# EAGLE board PnP-Expansion-V1 (EAGLE 9.3.0)
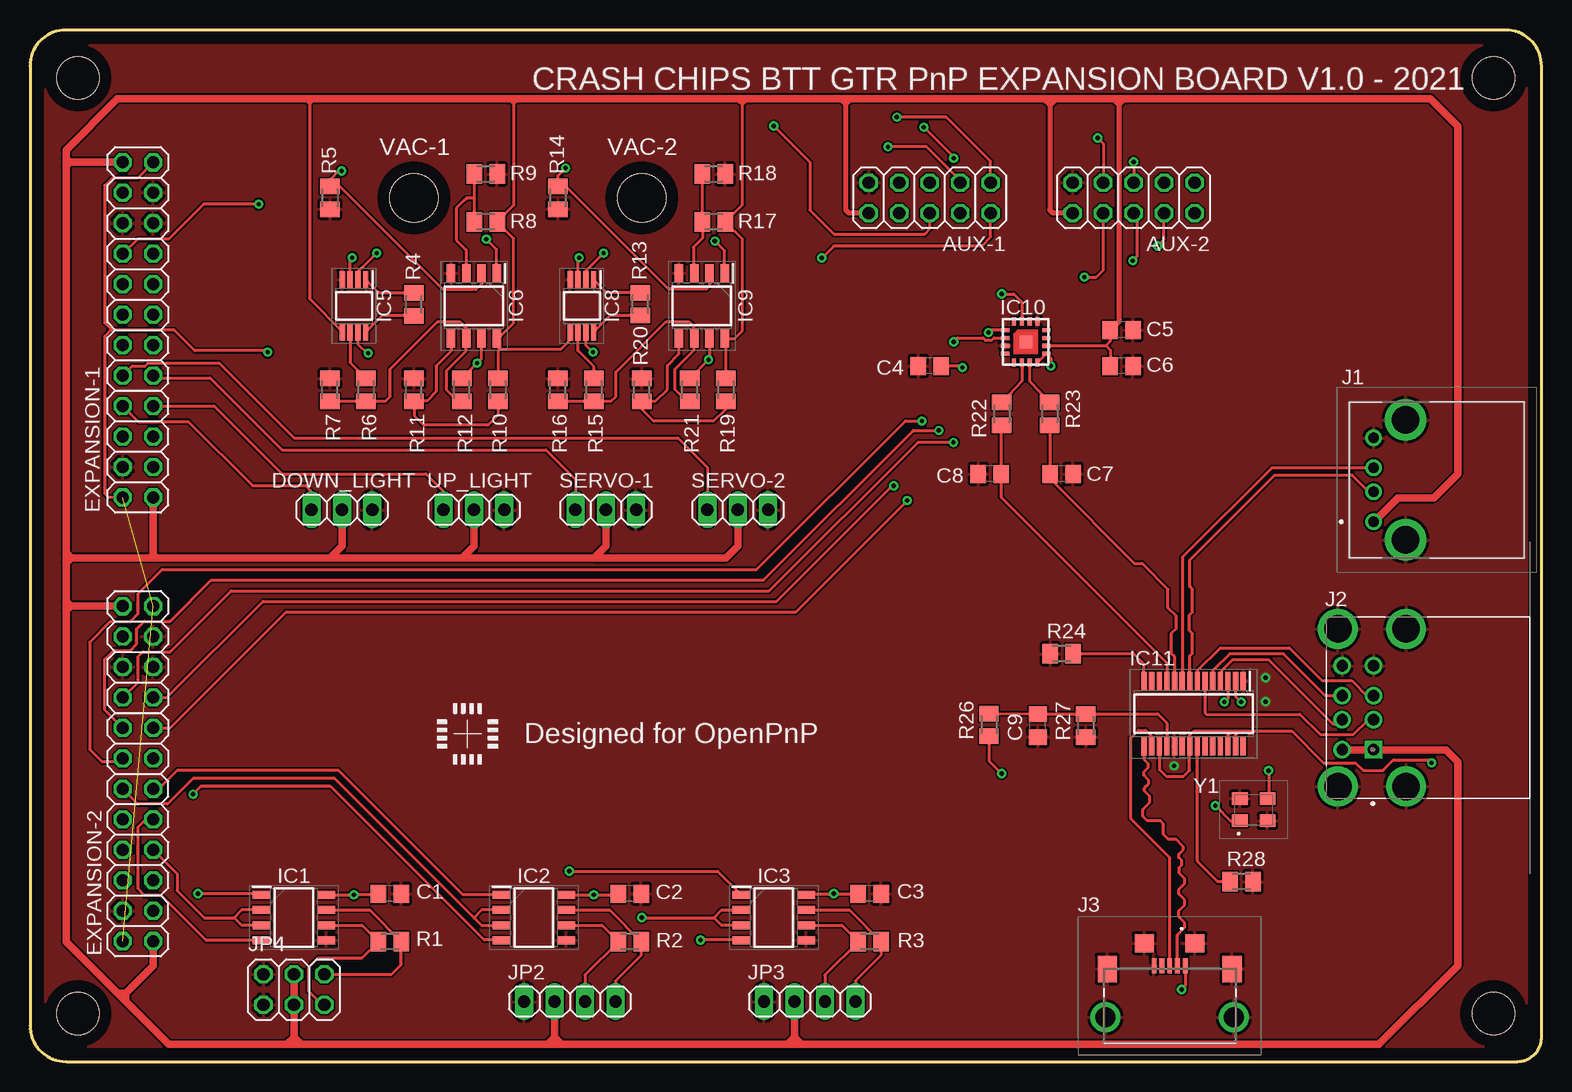
[diagram p0: board, top side]
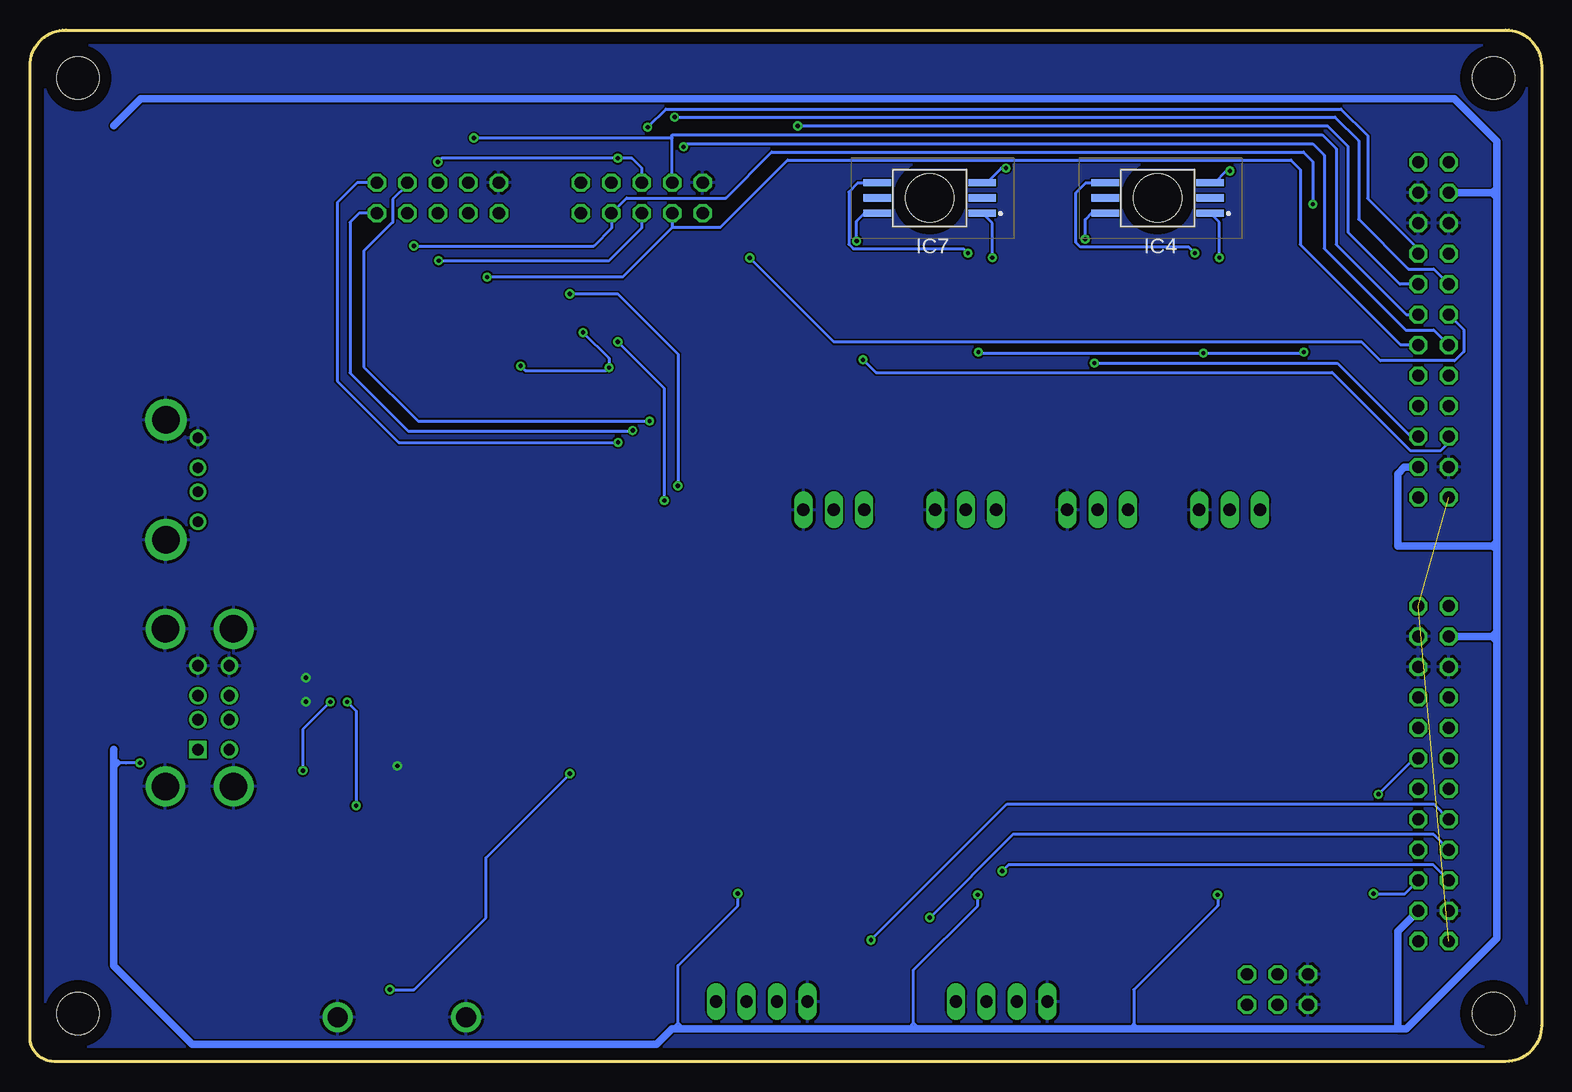
[diagram p1: board, bottom side, seen from below]

Size 126 x 86 mm. Coordinates in mm from the lower left corner, seen from the top.
Outline: 3,86 arc90 0,83 0,3 arc90 3,0 124,0 arc90 126,2 126,83 arc90 123,86 3,86
Copper layers (1*16): Top 0.035mm / dielectric 1.5mm / Bottom 0.035mm
Design rules "default *": minimum track width 6mil, minimum drill 0.35mm, track to track 6mil, track to pad 6mil, pad to pad 6mil, via to via 6mil, smd to smd 6mil, copper to edge 40mil, drill to drill 6mil, minimum pad ring 10mil, minimum via ring 8mil, stop-mask expansion 4mil, vias tented up to drill 0mil, thermal gap 10mil
Holes 3.5 mm at 4,82 122,82 122,4 4,4

## Footprints (pad centres in the part's own frame; a part is rotated, then mirrored left to right if it is on the bottom)
2X05 = drill 1.016 octagon: 1 -5.08,-1.27; 2 -5.08,1.27; 3 -2.54,-1.27; 4 -2.54,1.27; 5 0,-1.27; 6 0,1.27; 7 2.54,-1.27; 8 2.54,1.27; 9 5.08,-1.27; 10 5.08,1.27
C0805 = smd 1.3 x 1.5: 1 -0.95,0; 2 0.95,0
1X03 = drill 1.016 long: 1 -2.54,0; 2 0,0; 3 2.54,0
2X12 = drill 1.016 octagon: 1 -13.97,-1.27; 2 -13.97,1.27; 3 -11.43,-1.27; 4 -11.43,1.27; 5 -8.89,-1.27; 6 -8.89,1.27; 7 -6.35,-1.27; 8 -6.35,1.27; 9 -3.81,-1.27; 10 -3.81,1.27; 11 -1.27,-1.27; 12 -1.27,1.27; 13 1.27,-1.27; 14 1.27,1.27; 15 3.81,-1.27; 16 3.81,1.27; 17 6.35,-1.27; 18 6.35,1.27; 19 8.89,-1.27; 20 8.89,1.27; 21 11.43,-1.27; 22 11.43,1.27; 23 13.97,-1.27; 24 13.97,1.27
SOIC127P600X175-8N = smd 1.5 x 0.65: 1 -2.7,1.905; 2 -2.7,0.635; 3 -2.7,-0.635; 4 -2.7,-1.905; 5 2.7,-1.905; 6 2.7,-0.635; 7 2.7,0.635; 8 2.7,1.905
2SMPP03 = smd 2.3 x 0.6: 1 -4.375,1.27; 2 -4.375,0; 3 -4.375,-1.27; 4 4.375,-1.27; 5 4.375,0; 6 4.375,1.27 | hole 4: 0,0
SOP65P490X110-8N = smd 1.4 x 0.45: 1 -2.2,0.975; 2 -2.2,0.325; 3 -2.2,-0.325; 4 -2.2,-0.975; 5 2.2,-0.975; 6 2.2,-0.325; 7 2.2,0.325; 8 2.2,0.975
SOIC127P600X175-8N' = smd 1.525 x 0.7: 1 -2.712,1.905; 2 -2.712,0.635; 3 -2.712,-0.635; 4 -2.712,-1.905; 5 2.712,-1.905; 6 2.712,-0.635; 7 2.712,0.635; 8 2.712,1.905
QFN16 = smd 0.7 x 0.35: 1 -1.725,0.975; 2 -1.725,0.325; 3 -1.725,-0.325; 4 -1.725,-0.975; 9 1.725,-0.975; 10 1.725,-0.325; 11 1.725,0.325; 12 1.725,0.975 | smd 0.35 x 0.7: 5 -0.975,-1.725; 6 -0.325,-1.725; 7 0.325,-1.725; 8 0.975,-1.725; 13 0.975,1.725; 14 0.325,1.725; 15 -0.325,1.725; 16 -0.975,1.725 | smd 1 x 1: TAB 0,0
SOP64P600X173-28N = smd 1.525 x 0.435: 1 -2.712,4.128; 2 -2.712,3.492; 3 -2.712,2.858; 4 -2.712,2.222; 5 -2.712,1.588; 6 -2.712,0.952; 7 -2.712,0.318; 8 -2.712,-0.318; 9 -2.712,-0.952; 10 -2.712,-1.588; 11 -2.712,-2.222; 12 -2.712,-2.858; 13 -2.712,-3.492; 14 -2.712,-4.128; 15 2.712,-4.128; 16 2.712,-3.492; 17 2.712,-2.858; 18 2.712,-2.222; 19 2.712,-1.588; 20 2.712,-0.952; 21 2.712,-0.318; 22 2.712,0.318; 23 2.712,0.952; 24 2.712,1.588; 25 2.712,2.222; 26 2.712,2.858; 27 2.712,3.492; 28 2.712,4.128
UJ2AH4TH = drill 0.9 pad 1.4: 1 0,0; 2 2.5,0; 3 4.5,0; 4 7,0 | drill 2.3 pad 3.45: MH1 -1.5,-2.67; MH2 8.5,-2.67
CUI_UJ2-ADH-1-TH = drill 0.92 square: 1 0,0 | drill 0.92: 2 2.5,0; 3 4.5,0; 4 7,0; 5 0,2.62; 6 2.5,2.62; 7 4.5,2.62; 8 7,2.62 | drill 2.3: S1 -3.07,2.97; S2 10.07,2.97; S3 -3.07,-2.71; S4 10.07,-2.71
UJ2MIBH4MSMTTR = smd 1.25 x 0.4: 1 0,-1.3; 2 0,-0.65; 3 0,0; 4 0,0.65; 5 0,1.3 | drill 1.66 pad 2.49: MH1 -4.325,-5.35; MH2 -4.325,5.35 | smd 2.2 x 1.6: MP1 -0.275,-5.2; MP4 -0.275,5.2 | smd 1.5 x 1.6: MP2 1.875,-2.1; MP3 1.875,2.1
1X04 = drill 1.016 long: 1 -3.81,0; 2 -1.27,0; 3 1.27,0; 4 3.81,0
2X03 = drill 1.016 octagon: 1 -2.54,-1.27; 2 -2.54,1.27; 3 0,-1.27; 4 0,1.27; 5 2.54,-1.27; 6 2.54,1.27
M0805 = smd 1.3 x 1.6: 1 -0.95,0; 2 0.95,0
ABM812000MHZB2T = smd 1.3 x 1.05: 1 -1.15,-0.925; 2 1.15,-0.925; 3 1.15,0.925; 4 -1.15,0.925

## Placement (x,y rotation side)
AUX-1  [2X05]  75,72 180 top
AUX-2  [2X05]  92,72 180 top
C1  0.01uF  [C0805]  30,14 180 top
C2  0.01uF  [C0805]  50,14 180 top
C3  0.01uF  [C0805]  70,14 180 top
C4  100nF  [C0805]  75,58 180 top
C5  100nF  [C0805]  91,61 180 top
C6  4.7uF  [C0805]  91,58 180 top
C7  47pF  [C0805]  86,49 180 top
C8  47pF  [C0805]  80,49 180 top
C9  4.7uF  [C0805]  84,28 90 top
DOWN_LIGHT  [1X03]  26,46 0 top
EXPANSION-1  [2X12]  9,61 90 top
EXPANSION-2  [2X12]  9,24 90 top
IC1  SP3485EN-L  [SOIC127P600X175-8N]  22,12 0 top
IC2  SP3485EN-L  [SOIC127P600X175-8N]  42,12 0 top
IC3  SP3485EN-L  [SOIC127P600X175-8N]  62,12 0 top
IC4  2SMPP-03  [2SMPP03]  32,72 180 bottom
IC5  INA126EA_2K5  [SOP65P490X110-8N]  27,63 270 top
IC6  LM358DR2G  [SOIC127P600X175-8N']  37,63 270 top
IC7  2SMPP-03  [2SMPP03]  51,72 180 bottom
IC8  INA126EA_2K5  [SOP65P490X110-8N]  46,63 270 top
IC9  LM358DR2G  [SOIC127P600X175-8N']  56,63 270 top
IC10  FT230XQ  [QFN16]  83,60 0 top
IC11  XR22404CG28TR-F  [SOP64P600X173-28N]  97,29 270 top
J1  UJ2-AH-4-TH  [UJ2AH4TH]  112,45 90 top
J2  UJ2-ADH-1-TH  [CUI_UJ2-ADH-1-TH]  112,26 90 top
J3  UJ2-MIBH-4-MSMT-TR  [UJ2MIBH4MSMTTR]  95,8 90 top
JP2  [1X04]  45,5 0 top
JP3  [1X04]  65,5 0 top
JP4  [2X03]  22,6 0 top
R1  220R  [M0805]  30,10 0 top
R2  220R  [M0805]  50,10 0 top
R3  220R  [M0805]  70,10 0 top
R4  1K  [M0805]  32,63.13 270 top
R5  25K / 1%  [M0805]  25,72 90 top
R6  10K  [M0805]  28,56 90 top
R7  10K  [M0805]  25,56 270 top
R8  10k  [M0805]  38,70 0 top
R9  10k  [M0805]  38,74 180 top
R10  18K  [M0805]  39,56 90 top
R11  10K  [M0805]  32,56 270 top
R12  10K  [M0805]  36,56 270 top
R13  1K  [M0805]  50.87,63.14 270 top
R14  25K / 1%  [M0805]  44,72 90 top
R15  10K  [M0805]  47,56 90 top
R16  10K  [M0805]  44,56 270 top
R17  10k  [M0805]  57,70 0 top
R18  10k  [M0805]  57,74 180 top
R19  18K  [M0805]  58,56 90 top
R20  10K  [M0805]  51,56 270 top
R21  10K  [M0805]  55,56 270 top
R22  27R  [M0805]  81,54 90 top
R23  27R  [M0805]  85,54 90 top
R24  2.7K 1%  [M0805]  86,34 0 top
R26  10k  [M0805]  79.95,28.07 90 top
R27  100k  [M0805]  88,28 90 top
R28  10k  [M0805]  101,15 0 top
SERVO-1  [1X03]  48,46 0 top
SERVO-2  [1X03]  59,46 0 top
UP_LIGHT  [1X03]  37,46 0 top
Y1  ABM8-12.000MHZ-B2-T  [ABM812000MHZB2T]  102,21 0 top

## Library data of the parts
AUX-1 AUX-2 DOWN_LIGHT EXPANSION-1 EXPANSION-2 JP2-JP4 SERVO-1 SERVO-2 UP_LIGHT = pinhead
C1-C9 = rcl; SPICEPREFIX: C
IC1-IC3 = SP3485EN-L; ARROW_PART_NUMBER: SP3485EN-L; ARROW_PRICE-STOCK: https://www.arrow.com/en/products/sp3485en-l/exar; DESCRIPTION: Transceiver RS-485 3.3V 10Mbps SOIC8 SP3485EN-L, Line Transceiver, RS-485, RS-422 10Mbit/s Differential, 3.3 V, 8-Pin SOIC; HEIGHT: 1.75mm; MANUFACTURER_NAME: EXAR; MANUFACTURER_PART_NUMBER: SP3485EN-L; MOUSER_PART_NUMBER: 701-SP3485EN-L; MOUSER_PRICE-STOCK: https://www.mouser.com/Search/Refine.aspx?Keyword=701-SP3485EN-L
IC4 IC7 = 2SMPP-03; ARROW_PART_NUMBER: 2SMPP-03; ARROW_PRICE-STOCK: https://www.arrow.com/en/products/2smpp-03/omron; DESCRIPTION: OMRON ELECTRONIC COMPONENTS - 2SMPP-03 - SENSOR, PRESSURE, -50 TO 50KPA, 1, 2.6MM; HEIGHT: 3mm; MANUFACTURER_NAME: Omron Electronics; MANUFACTURER_PART_NUMBER: 2SMPP-03; MOUSER_PART_NUMBER: 653-2SMPP-03; MOUSER_PRICE-STOCK: https://www.mouser.co.uk/ProductDetail/Omron-Electronics/2SMPP-03?qs=4pif%2FGVLGwewIGFtpGK49A%3D%3D
IC5 IC8 = INA126EA_2K5; ARROW_PART_NUMBER: INA126EA/2K5; ARROW_PRICE-STOCK: https://www.arrow.com/en/products/ina126ea2k5/texas-instruments; DESCRIPTION: Micropower Instrumentation Amplifier Single and Dual Versions; HEIGHT: 1.1mm; MANUFACTURER_NAME: Texas Instruments; MANUFACTURER_PART_NUMBER: INA126EA/2K5; MOUSER_PART_NUMBER: 595-INA126EA/2K5; MOUSER_PRICE-STOCK: https://www.mouser.co.uk/ProductDetail/Texas-Instruments/INA126EA-2K5/?qs=VBduBm9rCJSYx1fsyzaOGQ%3D%3D
IC6 IC9 = LM358DR2G; ARROW_PART_NUMBER: LM358DR2G; ARROW_PRICE-STOCK: https://www.arrow.com/en/products/lm358dr2g/on-semiconductor; DESCRIPTION: LM358DR2G, Dual Operational Amplifier 5 to 28V, 8-Pin SOIC; HEIGHT: 1.75mm; MANUFACTURER_NAME: ON Semiconductor; MANUFACTURER_PART_NUMBER: LM358DR2G; MOUSER_PART_NUMBER: 863-LM358DR2G; MOUSER_PRICE-STOCK: https://www.mouser.co.uk/ProductDetail/ON-Semiconductor/LM358DR2G/?qs=2OtswVQKCOFTvDtJvQ3XHw%3D%3D
IC10 = ftdichip
IC11 = XR22404CG28TR-F; DESCRIPTION: IC USB 2.0 4-PORT HUB 28SSOP; HEIGHT: 1.73mm; MANUFACTURER_NAME: MaxLinear, Inc.; MANUFACTURER_PART_NUMBER: XR22404CG28TR-F; MOUSER_PART_NUMBER: 701-XR22404CG28TR-F; MOUSER_PRICE-STOCK: https://www.mouser.co.uk/ProductDetail/MaxLinear/XR22404CG28TR-F?qs=pMEWzlIAYnay3yoEWcwQ0g%3D%3D
J1 = UJ2-AH-4-TH; ARROW_PART_NUMBER: UJ2-AH-4-TH; ARROW_PRICE-STOCK: https://www.arrow.com/en/products/uj2-ah-4-th/cui-devices; DESCRIPTION: USB Connectors USB 2.0 type A jack 4 pin Horizontal TH; HEIGHT: 6.94mm; MANUFACTURER_NAME: CUI Inc.; MANUFACTURER_PART_NUMBER: UJ2-AH-4-TH; MOUSER_PART_NUMBER: 490-UJ2-AH-4-TH; MOUSER_PRICE-STOCK: https://www.mouser.co.uk/ProductDetail/CUI-Devices/UJ2-AH-4-TH/?qs=5mqXD9RfOg1V4xKoNh4Gxg%3D%3D
J2 = UJ2-ADH-1-TH; MANUFACTURER: CUI Devices; STANDARD: Manufacturer Recommendations
J3 = UJ2-MIBH-4-MSMT-TR; ARROW_PART_NUMBER: UJ2-MIBH-4-MSMT-TR; ARROW_PRICE-STOCK: https://www.arrow.com/en/products/uj2-mibh-4-msmt-tr/cui-devices; DESCRIPTION: USB Connectors USB 2.0 micro B jack 5 pin HZ mid-mnt SMT; HEIGHT: 2.45mm; MANUFACTURER_NAME: CUI Inc.; MANUFACTURER_PART_NUMBER: UJ2-MIBH-4-MSMT-TR; MOUSER_PART_NUMBER: 490-UJ2-MIBH-4-MSMT; MOUSER_PRICE-STOCK: https://www.mouser.co.uk/ProductDetail/CUI-Devices/UJ2-MIBH-4-MSMT-TR?qs=5mqXD9RfOg32NvuLASc7Xg%3D%3D
R1-R24 R26-R28 = rcl; SPICEPREFIX: R
Y1 = ABM8-12.000MHz-B2-T; ARROW_PART_NUMBER: ABM8-12.000MHZ-B2-T; ARROW_PRICE-STOCK: https://www.arrow.com/en/products/abm8-12.000mhz-b2-t/abracon; DESCRIPTION: ABRACON - ABM8-12.000MHZ-B2-T - Crystal, 12 MHz, SMD, 3.2mm x 2.5mm, 50 ppm, 18 pF, 20 ppm, ABM8 Series; HEIGHT: 0.8mm; MANUFACTURER_NAME: ABRACON; MANUFACTURER_PART_NUMBER: ABM8-12.000MHz-B2-T; MOUSER_PART_NUMBER: 815-ABM8-12-B2-T; MOUSER_PRICE-STOCK: https://www.mouser.co.uk/ProductDetail/ABRACON/ABM8-12000MHZ-B2-T?qs=hjiqo2PPvpiyy6%252BNWm3IZg%3D%3D

## Nets
3V3OUT: C4.1 IC10.1 IC10.8 IC10.9
485_1_RTS: EXPANSION-2.7 IC1.2 IC1.3
485_1_RXI: EXPANSION-2.5 IC1.1
485_1_TXO: EXPANSION-2.9 IC1.4
485_2_RTS: EXPANSION-2.12 IC2.2 IC2.3
485_2_RXI: EXPANSION-2.11 IC2.1
485_2_TXO: EXPANSION-2.13 IC2.4
485_3_RTS: EXPANSION-2.8 IC3.2 IC3.3
485_3_RXI: EXPANSION-2.6 IC3.1
485_3_TXO: EXPANSION-2.10 IC3.4
+3V3: C1.2 C2.2 C3.2 EXPANSION-1.3 EXPANSION-1.22 EXPANSION-2.3 EXPANSION-2.22 IC1.8 IC2.8 IC3.8 IC11.17 IC11.21 IC11.26 IC11.27
+5V: AUX-1.10 AUX-2.10 C5.2 C6.2 DOWN_LIGHT.2 EXPANSION-1.1 EXPANSION-1.24 EXPANSION-2.1 EXPANSION-2.24 IC5.5 IC6.8 IC8.5 IC9.8 IC10.10 J1.1 J2.1 J2.5 JP2.2 JP3.2 JP4.3 JP4.4 R8.2 R10.2 R17.2 R19.2 SERVO-1.2 SERVO-2.2 UP_LIGHT.2
+12V: EXPANSION-1.2 EXPANSION-1.23 EXPANSION-2.2 EXPANSION-2.23 IC5.7 IC8.7
AUX-DM: IC11.8 J1.2
AUX-DP: IC11.9 J1.3
AUX_1_A1: AUX-1.2 EXPANSION-1.14
AUX_1_A2: AUX-1.1 EXPANSION-1.16
AUX_1_D1: AUX-1.3 EXPANSION-1.12
AUX_2_A1: AUX-2.2 EXPANSION-2.16
AUX_2_A2: AUX-2.1 EXPANSION-2.18
AUX_2_D1: AUX-2.3 EXPANSION-2.14
CAM-1-DM: IC11.6 J2.2
CAM-1-DP: IC11.7 J2.3
CAM-2-DM: IC11.4 J2.6
CAM-2-DP: IC11.5 J2.7
CRYSTAL-1: IC11.3 Y1.1
CRYSTAL-2: IC11.2 Y1.3
DOWN_LIGHT_SIG: DOWN_LIGHT.1 EXPANSION-1.8
GND: AUX-1.9 AUX-2.9 C1.1 C2.1 C3.1 C4.2 C5.1 C6.1 C7.1 C8.2 C9.1 DOWN_LIGHT.3 EXPANSION-1.4 EXPANSION-1.19 EXPANSION-1.20 EXPANSION-1.21 EXPANSION-2.4 EXPANSION-2.19 EXPANSION-2.20 EXPANSION-2.21 IC1.5 IC2.5 IC3.5 IC5.4 IC6.4 IC8.4 IC9.4 IC10.3 IC10.13 IC11.1 IC11.19 J1.4 J1.MH1 J1.MH2 J2.4 J2.8 J2.S1 J2.S2 J2.S3 J2.S4 J3.5 J3.MH1 J3.MH2 J3.MP1 J3.MP2 J3.MP3 J3.MP4 JP2.1 JP3.1 JP4.1 JP4.2 R5.1 R7.1 R9.1 R11.1 R14.1 R16.1 R18.1 R20.1 R24.1 R27.1 R28.2 SERVO-1.3 SERVO-2.3 UP_LIGHT.3 Y1.2 Y1.4
HOST-5V: J3.1 R26.1
HOST-DM: IC11.15 J3.2
HOST-DP: IC11.16 J3.3
MCU-DM: C7.2 IC11.10 R23.1
MCU-DP: C8.1 IC11.11 R22.1
MCU_UART_RX: EXPANSION-2.17 IC10.15
MCU_UART_TX: EXPANSION-2.15 IC10.2
MISO: AUX-1.5 AUX-2.5 EXPANSION-1.17
MOSI: AUX-1.6 AUX-2.6 EXPANSION-1.15
N$1: IC3.7 JP3.4 R3.2
N$2: IC3.6 JP3.3 R3.1
N$3: IC2.6 JP2.3 R2.1
N$4: IC2.7 JP2.4 R2.2
N$5: IC11.22 R28.1
N$6: IC1.6 JP4.5 R1.1
N$7: IC4.1 IC5.3
N$8: IC5.1 R4.1
N$9: IC5.8 R4.2
N$10: IC4.4 IC5.2
N$11: IC4.6 IC6.1
N$12: IC4.3 IC6.2 R5.2
N$13: IC6.3 R8.1 R9.2
N$14: IC5.6 R6.2
N$15: IC6.6 R6.1 R7.2 R12.2
N$16: IC6.5 R10.1 R11.2
N$17: IC7.1 IC8.3
N$18: IC8.1 R13.1
N$19: IC8.8 R13.2
N$20: IC7.4 IC8.2
N$21: IC7.6 IC9.1
N$22: IC7.3 IC9.2 R14.2
N$23: IC9.3 R17.1 R18.2
N$24: IC8.6 R15.2
N$25: IC9.6 R15.1 R16.2 R21.2
N$26: IC9.5 R19.1 R20.2
N$27: IC10.6 R22.2
N$28: IC10.7 R23.2
N$29: IC11.14 R24.2
N$30: IC1.7 JP4.6 R1.2
SCK: AUX-1.4 AUX-2.4 EXPANSION-1.18
SCL: AUX-1.7 AUX-2.7 EXPANSION-1.13
SDA: AUX-1.8 AUX-2.8 EXPANSION-1.11
SERVO_1_SIG: EXPANSION-1.9 SERVO-1.1
SERVO_2_SIG: EXPANSION-1.10 SERVO-2.1
UP_LIGHT_SIG: EXPANSION-1.7 UP_LIGHT.1
VAC_SIG_1: EXPANSION-1.5 IC6.7 R12.1
VAC_SIG_2: EXPANSION-1.6 IC9.7 R21.1
VBUS-SENSE: C9.2 IC11.18 R26.2 R27.2

## Tracks (layer width: path | path; a pad name or v marks a point on that pad's centre or on a via)
3V3OUT  (via drill 0.35)
  Top 0.254: IC10.8 IC10.9 85.11,58.64 v85.11,57.99 | v77.74,57.87 77.61,58 C4.1 | IC10.1 80.09,60.98 v79.9,60.79
  Bottom 0.254: v85.11,57.99 84.72,57.61 77.99,57.61 v77.74,57.87 77.74,58.63 v79.9,60.79
485_1_RTS
  Top 0.254: IC1.2 17.64,12.63 17,12 | IC1.3 17.64,11.37 17,12 | 17,12 14.51,12 12.27,14.24 12.27,15.65 EXPANSION-2.7
485_1_RXI  (via drill 0.35)
  Top 0.254: IC1.1 19.2,14 v14,14
  Bottom 0.254: v14,14 11.38,14 EXPANSION-2.5
485_1_TXO
  Top 0.254: IC1.4 14.7,10.1 10.92,13.87 9.53,13.87 9,14.4 9,19.55 9.63,20.19 EXPANSION-2.9
485_2_RTS
  Top 0.254: IC2.2 37.63,12.63 37,12 | 37,12 37.63,11.37 IC2.3 | 37,12 25.41,23.59 13.59,23.59 11.48,21.48 8.98,21.48 EXPANSION-2.12
485_2_RXI
  Top 0.254: IC2.1 36.09,13.9 25.75,24.25 12.25,24.25 10.73,22.73 EXPANSION-2.11
485_2_TXO  (via drill 0.35)
  Top 0.254: IC2.4 39.27,10.13 37.87,10.13 25.08,22.92 14.22,22.92 v13.59,22.29
  Bottom 0.254: v13.59,22.29 10.6,25.27 EXPANSION-2.13
485_3_RTS  (via drill 0.35)
  Top 0.254: IC3.3 57.63,11.37 57,12 | 57,12 57.63,12.63 IC3.2 | v51,12 57,12
  Bottom 0.254: EXPANSION-2.8 9,18.92 44.08,18.92 v51,12
485_3_RXI  (via drill 0.35)
  Top 0.254: v44.96,15.88 57.33,15.88 IC3.1
  Bottom 0.254: EXPANSION-2.6 9,16.38 44.45,16.38 v44.96,15.88
485_3_TXO  (via drill 0.35)
  Top 0.254: IC3.4 59.27,10.13 v55.89,10.13
  Bottom 0.254: v55.89,10.13 44.56,21.46 9,21.46 EXPANSION-2.10
+3V3  (via drill 0.35)
  Top 0.254: IC3.8 64.8,14 v67,14 C3.2 | IC2.8 v47,13.9 48.95,13.9 C2.2 | IC1.8 v27,13.9 28.95,13.9 C1.2 | v116.84,24.89 116.82,24.89 116.57,25.15 113.67,25.15 112.78,24.26 111.12,24.26 110.49,24.89 107.82,24.89 105.17,27.54 100.84,27.54 | 100.2,27.54 97.01,27.54 96.68,27.21 IC11.21 96.65,26.25 96.65,24.26 96.14,23.75 94.74,23.75 94.14,24.35 IC11.17 | 100.2,27.54 100.84,27.54 | IC11.26 99.86,27.2 100.2,27.54 | IC11.27 100.49,27.2 100.84,27.54
  Bottom 0.254: 72.49,2.75 72,3.24 | 72,3.24 72,8 67,13 v67,14 | 72,3.24 71.51,2.75 71.5,2.75 | 52.37,3.21 52.37,7.63 47,13 v47,13.9 | 52.37,3.21 52.83,2.75 | 52.37,3.21 51.9,2.75 51.82,2.75 | v27,13.9 27,13 34,6 34,3.16 | 34,3.16 34.42,2.75 | 34,3.16 33.58,2.75 33.4,2.75 | v116.84,24.89 117.98,24.89 118.49,24.89 | 119.02,24.77 118.89,24.89 118.49,24.89 | 118.49,24.89 119.02,25.41 119.02,26.04 | 118.49,24.89 118.87,24.51 119.02,24.51
  Bottom 0.61: EXPANSION-2.3 12,10.84 12,2.75 | 12,2.75 11.25,2.75 3.75,10.25 3.75,35.05 | 119.02,78.02 116.78,80.25 7.25,80.25 3.75,76.75 3.75,72.77 | 12,2.75 33.4,2.75 34.42,2.75 51.82,2.75 52.83,2.75 71.5,2.75 72.49,2.75 73.79,1.45 112.48,1.45 119.02,7.98 119.02,24.51 119.02,24.77 119.02,26.04 | 3.75,72.77 3.75,72.14 | 3.75,72.14 3.75,43.31 | 3.75,43.31 3.75,42.67 | 3.75,42.67 3.75,35.69 | 3.75,35.69 3.75,35.05 | EXPANSION-1.22 4.09,72.43 | 4.09,72.43 3.75,72.77 | 4.09,72.43 3.79,72.14 3.75,72.14 | EXPANSION-1.3 11.43,49.57 12,49 12,43 4.05,43 | 4.05,43 3.75,43.31 | 4.05,43 4.05,42.98 3.75,42.67 | EXPANSION-2.22 4.12,35.43 | 4.12,35.43 3.75,35.05 | 4.12,35.43 3.87,35.69 3.75,35.69
+5V
  Top 0.254: R19.2 58,60.19 IC9.8 58.75,60.29 59.38,60.92 59.38,68.57 R17.2 59.38,71.43 59.38,80.26 59.12,80 59.38,79.75 59.88,80.25 60.07,80.25 | 40.33,79.8 40.33,71.38 R8.2 40.33,68.62 40.33,61.58 39.03,60.29 IC6.8 38.91,59.65 39.16,59.4 | 39.16,59.4 44.26,59.4 45.02,60.16 IC8.5 | 39.16,59.4 39,59.25 R10.2 | 23.31,79.82 23.31,63.59 26.02,60.87 IC5.5 | IC10.10 89.67,59.67 | C5.2 90.05,60.05 89.67,59.67 | 89.67,59.67 90.05,59.3 C6.2 | 40.33,79.8 39.87,80.25 | 40.33,79.8 40.77,80.24 40.77,80.25 | 23.31,79.82 22.87,80.25 | 23.31,79.82 23.74,80.25 23.88,80.25 | 91.16,80.16 91.26,80.25 91.57,80.25
  Top 0.406: AUX-1.10 68.27,70.73 68,71 68,79.8 | AUX-2.10 85.27,70.73 85,71 85,79.71 | 85,79.71 84.45,80.25 | 68,79.8 67.55,80.25 | 68,79.8 68.45,80.25 | 85,79.71 85.55,80.25 85.6,80.25 | 90.75,79.75 90.75,61.7 C5.2 | 90.75,79.75 91.16,80.16 | 90.75,79.75 90.25,80.25
  Top 0.61: SERVO-2.2 59,43 58,42 47,42 | SERVO-1.2 48,43 47,42 | 47,42 36,42 | 36,42 25,42 | DOWN_LIGHT.2 26,43 25,42 | UP_LIGHT.2 37,43 36,42 | 3,75.26 3,76 7.25,80.25 22.87,80.25 23.88,80.25 39.87,80.25 40.77,80.25 60.07,80.25 67.55,80.25 68.45,80.25 84.45,80.25 85.6,80.25 90.25,80.25 91.57,80.25 116.75,80.25 119,78 119,49 117,47 114,47 J1.1 | 3,75.26 3,74.68 | 3,74.68 3,42.42 | 3,42.42 3,41.58 | 3,41.58 3,38.35 | 3,38.35 3,37.59 | 3,37.59 3,10 7.33,5.67 | 7.33,5.67 7.96,5.04 | 3.42,42 3,42.42 | 25,42 10.54,42 | 10.54,42 10,42 | 10,42 3.42,42 | 3.42,42 3,41.58 | EXPANSION-2.24 3.38,37.97 | 3.38,37.97 3,37.59 | 3.38,37.97 3,38.35 | EXPANSION-1.1 10.27,42.27 | 10.27,42.27 10,42 | 10.27,42.27 10.54,42 | EXPANSION-2.1 10.27,7.98 7.96,5.67 | 7.96,5.67 7.96,5.04 | 7.96,5.67 7.33,5.67 | EXPANSION-1.24 3.29,74.97 | 3.29,74.97 3,74.68 | 3.29,74.97 3,75.26 | J2.5 J2.1 118,26 119,25 119,8 112.45,1.45 64.31,1.45 | 64.31,1.45 64,1.45 | 64,1.45 63.15,1.45 | 63.15,1.45 44.31,1.45 | 44.31,1.45 43.18,1.45 | 7.96,5.04 11.55,1.45 21.42,1.45 | JP3.2 63.73,2.03 | 63.73,2.03 63.73,1.72 64,1.45 | 63.73,2.03 63.15,1.45 | 63.73,2.03 64.31,1.45 | JP2.2 43.73,2.03 | 43.73,2.03 43.73,1.53 | 43.73,2.03 43.18,1.48 43.18,1.45 | 43.73,2.03 44.31,1.45 | 21.42,1.45 22,1.45 | 22,1.45 22.58,1.45 | 22.58,1.45 43.18,1.45 | JP4.4 JP4.3 22,2.03 | 22,2.03 22,1.45 | 22,2.03 22.58,1.45 | 22,2.03 21.42,1.45
+12V  (via drill 0.35)  (2 unrouted)
  Top 0.254: IC8.7 46.33,59.74 v46.93,59.14 | IC5.7 27.32,59.82 28.09,59.05 v28.19,59.05 | 6.86,60.96 12.04,60.96 13.73,59.27 19.68,59.27 v19.81,59.14 | 6.86,60.96 6.73,60.96 6.22,60.45 6.22,47.37 6.56,47.03 EXPANSION-1.2 | EXPANSION-1.23 8.96,73.66 6.86,73.66 6.22,73.03 6.22,61.59 6.86,60.96
  Bottom 0.254: v46.93,59.14 46.84,59.05 v28.19,59.05 19.9,59.05 v19.81,59.14
AUX-DM
  Top 0.254: J1.2 111.62,47.5 110.25,48.87 103.75,48.87 96.68,41.81 96.68,39.59 96.9,39.37 96.9,37.47 96.65,37.21 96.65,35.94 96.9,35.69 96.9,34.04 96.68,33.82 IC11.8
AUX-DP
  Top 0.254: J1.3 103.5,49.5 96.05,42.05 IC11.9
AUX_1_A1  (via drill 0.35)
  Top 0.254: v66,67 67,68 79.35,68 80.08,68.73 AUX-1.2
  Bottom 0.254: EXPANSION-1.14 6.48,61.02 6.48,59.18 7.24,58.42 13.42,58.42 15,60 59,60 v66,67
AUX_1_A2  (via drill 0.35)
  Top 0.254: AUX-1.1 80.08,75.05 76.38,78.75 v72.25,78.75
  Bottom 0.254: EXPANSION-1.16 9,66.08 11.1,66.08 15.24,70.22 15.24,76.76 17.22,78.75 v72.25,78.75
AUX_1_D1  (via drill 0.35)
  Top 0.254: AUX-1.3 77.54,73.46 74.75,76.25 v71.52,76.25
  Bottom 0.254: v71.52,76.25 71.27,76.51 19.06,76.51 18.11,75.56 18.11,67.78 11.32,60.98 8.98,60.98 EXPANSION-1.12
AUX_2_A1  (via drill 0.35)
  Top 0.254: EXPANSION-2.16 6.22,29.32 6.22,33.53 6.99,34.29 8.38,34.29 8.89,34.8 8.89,36.07 9.53,36.7 11.68,36.7 15.11,40.13 61.15,40.13 73.64,52.62 v75.76,52.62
  Bottom 0.254: AUX-2.2 98.56,70.73 99.31,69.98 99.31,57.4 94.49,52.58 75.92,52.58 75.88,52.62 v75.76,52.62
AUX_2_A2  (via drill 0.35)
  Top 0.254: EXPANSION-2.18 9,31.62 9,33.77 9.4,34.16 11.68,34.16 16.76,39.24 61.62,39.24 74,51.62 v76.98,51.62
  Bottom 0.254: AUX-2.1 98.73,73.27 100.38,71.62 100.38,56.75 95.25,51.62 v76.98,51.62
AUX_2_D1  (via drill 0.35)
  Top 0.254: EXPANSION-2.14 7.46,25 6,25 5,26 5,35 6.7,36.7 8.38,36.7 9.02,37.34 9.02,39.02 11.02,41.02 60.57,41.02 72.96,53.41 v74.34,53.41
  Bottom 0.254: AUX-2.3 94.54,73.1 95.76,71.88 95.76,69.98 98.17,67.56 98.17,57.91 93.67,53.41 v74.34,53.41
CAM-1-DM
  Top 0.254: J2.2 111.55,28.5 110.3,27.25 107.57,27.25 105.87,28.96 98.04,28.96 97.95,29.05 IC11.6
CAM-1-DP
  Top 0.254: IC11.7 97.33,31.72 97.33,32.59 99.23,34.49 104.96,34.49 107.7,31.75 110.17,31.75 111.42,30.5 J2.3
CAM-2-DM
  Top 0.254: IC11.4 99.23,31.72 99.23,32.46 100.28,33.51 103.24,33.51 108.63,28.12 109,28.12 J2.6
CAM-2-DP
  Top 0.254: J2.7 108,30.5 104.5,34 100,34 98.59,32.59 IC11.5
CRYSTAL-1  (via drill 0.35)
  Top 0.254: IC11.3 99.86,30.26 v99.57,29.97 | v98.81,21.34 100.07,20.07 Y1.1
  Bottom 0.254: v99.57,29.97 98.81,29.21 v98.81,21.34
CRYSTAL-2  (via drill 0.35)
  Top 0.254: IC11.2 100.49,30.45 v100.97,29.97 | v103.25,24.26 103.25,22.03 Y1.3
  Bottom 0.254: v100.97,29.97 103.25,27.69 v103.25,24.26
DOWN_LIGHT_SIG
  Top 0.254: EXPANSION-1.8 9.04,53.34 13.21,53.34 18.54,48.01 22.99,48.01 23.37,47.62 23.37,46.09 DOWN_LIGHT.1
GND  (via drill 0.35)
  other vias: 103,32 103,30 95.38,24.64
  pour Top: 0,63 0,83 arc-90 3,86 123,86 arc-90 126,83 126,2 arc-90 124,0 3,0 arc-90 0,3
  pour Bottom: 0,75 0,83 arc-90 3,86 123,86 arc-90 126,83 126,2 arc-90 124,0 3,0 arc-90 0,3
HOST-5V  (via drill 0.35)
  Top 0.254: J3.1 96.3,6.3 v96,6 | R26.1 79.95,25.05 v81,24
  Bottom 0.254: v96,6 94,6 88,12 88,17 v81,24
HOST-DM
  Top 0.254: IC11.15 92.86,26.27 92.88,26.25 92.88,25.16 93.22,24.82 93.22,24.51 92.84,24.13 92.84,23.88 93.22,23.5 93.22,23.11 92.9,22.8 92.9,22.54 93.34,22.1 93.34,21.59 92.77,21.02 92.77,20.45 93.15,20.07 94.23,20.07 94.49,19.81 94.49,18.92 94.87,18.54 95.5,18.54 96.14,17.91 96.14,17.65 95.76,17.27 95.76,17.02 96.01,16.76 96.01,16.38 95.76,16.13 95.76,15.75 96.27,15.24 96.27,14.86 95.76,14.35 95.76,13.97 96.27,13.46 96.27,13.08 95.76,12.57 95.76,12.06 96.27,11.56 96.27,11.18 95.65,10.56 J3.2
HOST-DP
  Top 0.254: J3.3 95,17 91.76,20.24 91.76,27 92.38,27.62 93,27.62 93.51,27.11 IC11.16
MCU-DM
  Top 0.254: R23.1 85,49.05 C7.2 85.05,48.55 92.08,41.53 92.71,41.53 94.87,39.37 94.87,37.83 95.5,37.2 95.5,36.05 95.12,35.67 95.12,34.03 95.4,33.75 95.4,31.72 IC11.10
MCU-DP
  Top 0.254: R22.1 80.95,53 C8.1 80.95,47.05 94.78,33.22 IC11.11
MCU_UART_RX  (via drill 0.35)
  Top 0.254: EXPANSION-2.17 11.41,30.35 19.43,38.37 62.24,38.37 71.87,48 v72,48 | v81,64 82,64 82.67,63.33 IC10.15
  Bottom 0.254: v72,48 72,59 77,64 v81,64
MCU_UART_TX  (via drill 0.35)
  Top 0.254: EXPANSION-2.15 11.68,27.81 21.36,37.49 63.86,37.49 v73.13,46.76 | v77,60 77.33,60.33 79.43,60.33 79.63,60.13 80.17,60.13 80.37,60.33 IC10.2
  Bottom 0.254: v73.13,46.76 73.13,56.13 v77,60
MISO  (via drill 0.35)
  Top 0.254: v92,75 AUX-2.5 | v77,75.31 77,75.42 v74.51,77.91
  Bottom 0.254: AUX-1.5 75,74.49 75.82,75.31 v77,75.31 91.69,75.31 v92,75 | EXPANSION-1.17 10.27,67.73 14.49,71.95 14.49,77.19 16.71,79.42 73,79.42 v74.51,77.91
MOSI  (via drill 0.35)
  Top 0.254: v91.92,66.76 92.25,67.09 92.25,70.48 AUX-2.6 | v62,78 65,75 65,71 67,69 74.59,69 75.06,69.47 75,69.53 AUX-1.6
  Bottom 0.254: AUX-1.6 75,69.51 77.75,66.76 v91.92,66.76 | EXPANSION-1.15 11.81,64.81 16.11,69.11 16.11,76.29 17.82,78 v62,78
N$1
  Top 0.254: IC3.7 68.31,12.63 R3.2 70.95,8.86 68.81,6.72 JP3.4
N$2
  Top 0.254: IC3.6 67.69,11.37 R3.1 66.27,7.22 JP3.3
N$3
  Top 0.254: IC2.6 47.69,11.37 R2.1 46.27,7.22 JP2.3
N$4
  Top 0.254: IC2.7 48.31,12.63 R2.2 50.95,8.86 48.81,6.72 JP2.4
N$5
  Top 0.254: R28.1 99,15 97.32,16.68 IC11.22
N$6
  Top 0.254: IC1.6 27.68,11.37 R1.1 27.69,8.64 24,8.64 23.24,7.87 23.24,5.84 24.35,4.73 JP4.5
N$7  (via drill 0.35)
  Top 0.254: IC5.3 26.68,66.83 v26.86,67.01
  Bottom 0.254: v26.86,67.01 26.86,69.97 IC4.1
N$8
  Top 0.254: R4.1 29.1,64.08 IC5.1
N$9
  Top 0.254: R4.2 29.35,62.18 IC5.8
N$10  (via drill 0.35)
  Top 0.254: v28.9,67.39 27.68,66.18 27.63,66.18 27.32,65.87 IC5.2
  Bottom 0.254: v28.9,67.39 29.4,67.9 38.42,67.9 38.8,68.28 38.8,72.43 37.97,73.27 IC4.4
N$11  (via drill 0.35)
  Top 0.254: IC6.1 38.91,67.7 v38.04,68.56
  Bottom 0.254: v38.04,68.56 38.04,70.21 37.52,70.73 IC4.6
N$12  (via drill 0.35)
  Top 0.254: IC6.2 37.63,64.83 37.15,64.35 34.44,64.35 25.84,72.95 R5.2 25,73.53 25.72,74.25 v25.98,74.25
  Bottom 0.254: IC4.3 27.24,73.27 26.26,74.25 v25.98,74.25
N$13
  Top 0.254: R8.1 37.05,72 | 37.05,72 R9.2 | 37.05,72 36.38,72 36.17,71.78 35.52,71.14 35.52,68.49 36.37,67.65 IC6.3
N$14
  Top 0.254: IC5.6 26.68,58.27 R6.2
N$15
  Top 0.254: R7.2 R6.1 29.63,55.05 30.04,55.46 30.04,57.74 33.98,61.68 35.85,61.68 36.36,61.17 IC6.6 36.37,59.29 36.39,59.27 34.74,57.62 34.74,55.97 35.5,55.2 35.85,55.2 R12.2
N$16
  Top 0.254: IC6.5 35.09,59.24 33.85,58 33.85,55.84 33.09,55.08 32.07,55.08 | 32.07,55.08 32.03,55.08 R11.2 | R10.1 39,53.88 38.17,53.04 32.83,53.04 32.07,53.81 32.07,55.08
N$17  (via drill 0.35)
  Top 0.254: IC8.3 45.67,66.9 v45.79,67.01
  Bottom 0.254: v45.79,67.01 45.79,69.89 IC7.1
N$18
  Top 0.254: R13.1 48.08,64.09 IC8.1
N$19
  Top 0.254: R13.2 48.37,62.19 IC8.8
N$20  (via drill 0.35)
  Top 0.254: v47.82,67.39 46.33,65.9 IC8.2
  Bottom 0.254: IC7.4 55.43,73.21 57.02,73.21 57.75,72.49 57.75,68.14 57.36,67.75 48.18,67.75 v47.82,67.39
N$21  (via drill 0.35)
  Top 0.254: IC9.1 57.91,67.6 v57.09,68.41
  Bottom 0.254: v57.09,68.41 57.09,70.06 56.42,70.73 IC7.6
N$22  (via drill 0.35)
  Top 0.254: IC9.2 56.63,64.64 56.38,64.38 53.24,64.38 44.67,72.95 R14.2 44.01,73.87 v44.63,74.49
  Bottom 0.254: IC7.3 46.24,73.27 45.02,74.49 v44.63,74.49
N$23
  Top 0.254: IC9.3 55.31,65.77 55.31,67.9 56.05,68.64 R17.1 R18.2
N$24
  Top 0.254: R15.2 47,57.93 45.67,59.25 IC8.6
N$25
  Top 0.254: R21.2 54.75,55.05 53.79,56.01 53.79,57.74 55.37,59.32 IC9.6 55.31,60.34 55.31,61.3 54.93,61.68 53.03,61.68 48.84,57.49 48.84,55.46 48.43,55.05 R15.1 R16.2
N$26
  Top 0.254: R19.1 58,54.41 56.97,53.38 51.98,53.38 51,54.37 R20.2 52.14,55.05 53.13,56.03 53.13,58.04 54.09,59.01 IC9.5
N$27
  Top 0.254: IC10.6 82.67,56.73 R22.2
N$28
  Top 0.254: IC10.7 83.33,56.73 R23.2
N$29
  Top 0.254: IC11.14 92.87,33.13 92,34 R24.2
N$30
  Top 0.254: IC1.7 28.32,12.63 R1.2 30.95,8.08 30.14,7.27 JP4.6
SCK  (via drill 0.35)
  Top 0.254: v94,68 94.54,68.54 AUX-2.4 | v19.07,71.48 14.46,71.48 11.56,68.58 8.96,68.58 EXPANSION-1.18
  Bottom 0.254: v94,68 79,68 77.54,69.46 AUX-1.4 76.27,72 68,72 64.18,75.82 19.84,75.82 19.07,75.04 v19.07,71.48
SCL  (via drill 0.35)
  Top 0.254: v89,77 89.46,76.54 AUX-2.7
  Bottom 0.254: AUX-1.7 72.46,77 | 72.46,77 72.46,77.25 18.28,77.25 17.11,76.09 17.11,68.11 11.27,62.27 EXPANSION-1.13 | 72.46,77 v89,77
SDA  (via drill 0.35)
  Top 0.254: v87.88,65.41 88.88,65.41 89.46,65.98 AUX-2.8
  Bottom 0.254: AUX-1.8 72.46,69.54 | 72.46,69.54 76.59,65.41 v87.88,65.41 | 72.46,69.54 68.46,69.54 62.85,75.15 20.9,75.15 20.11,74.36 20.11,68.11 11.73,59.73 EXPANSION-1.11
SERVO_1_SIG
  Top 0.254: EXPANSION-1.9 10.46,57 15,57 21,51 43,51 45.46,48.54 SERVO-1.1
SERVO_2_SIG
  Top 0.254: EXPANSION-1.10 8.54,58 9.61,58 9.84,58.23 15.77,58.23 22,52 54,52 56.46,49.54 SERVO-2.1
UP_LIGHT_SIG
  Top 0.254: EXPANSION-1.7 15.35,54.65 21,49 33,49 34.46,47.54 UP_LIGHT.1
VAC_SIG_1  (via drill 0.35)
  Top 0.254: IC6.7 37.63,58.59 v37.28,58.23 R12.1
  Bottom 0.254: v37.28,58.23 17.02,58.23 10.9,52.11 EXPANSION-1.5
VAC_SIG_2  (via drill 0.35)
  Top 0.254: IC9.7 56.63,58.59 v56.56,58.51 R21.1
  Bottom 0.254: EXPANSION-1.6 7.73,51.6 8.4,50.93 10.93,50.93 17.44,57.44 55.49,57.44 v56.56,58.51
VBUS-SENSE
  Top 0.254: R26.2 84,29 | 84,29 88,29 | 88,29 94,29 94.78,28.22 IC11.18 | C9.2 84,29 | R27.2 88,29

## Text on the board
tPlace: VAC-1 | VAC-2
tNames: CRASH CHIPS BTT GTR PnP EXPANSION BOARD V1.0 - 2021 | Designed for OpenPnP